# Altium PCB 7688A转接板-V3.2.PcbDoc (part 1 of 2)
Units mm, origin at the board's own origin, x right, y up, seen from the top; angles counter-clockwise.
Board outline 53 x 34 mm, 2 copper layers (Top, Bottom), stack 1.981 mm thick; 6 components, 131 nets, 220 pads, 60 vias.
Unrouted connection lines stored in the file: 5.
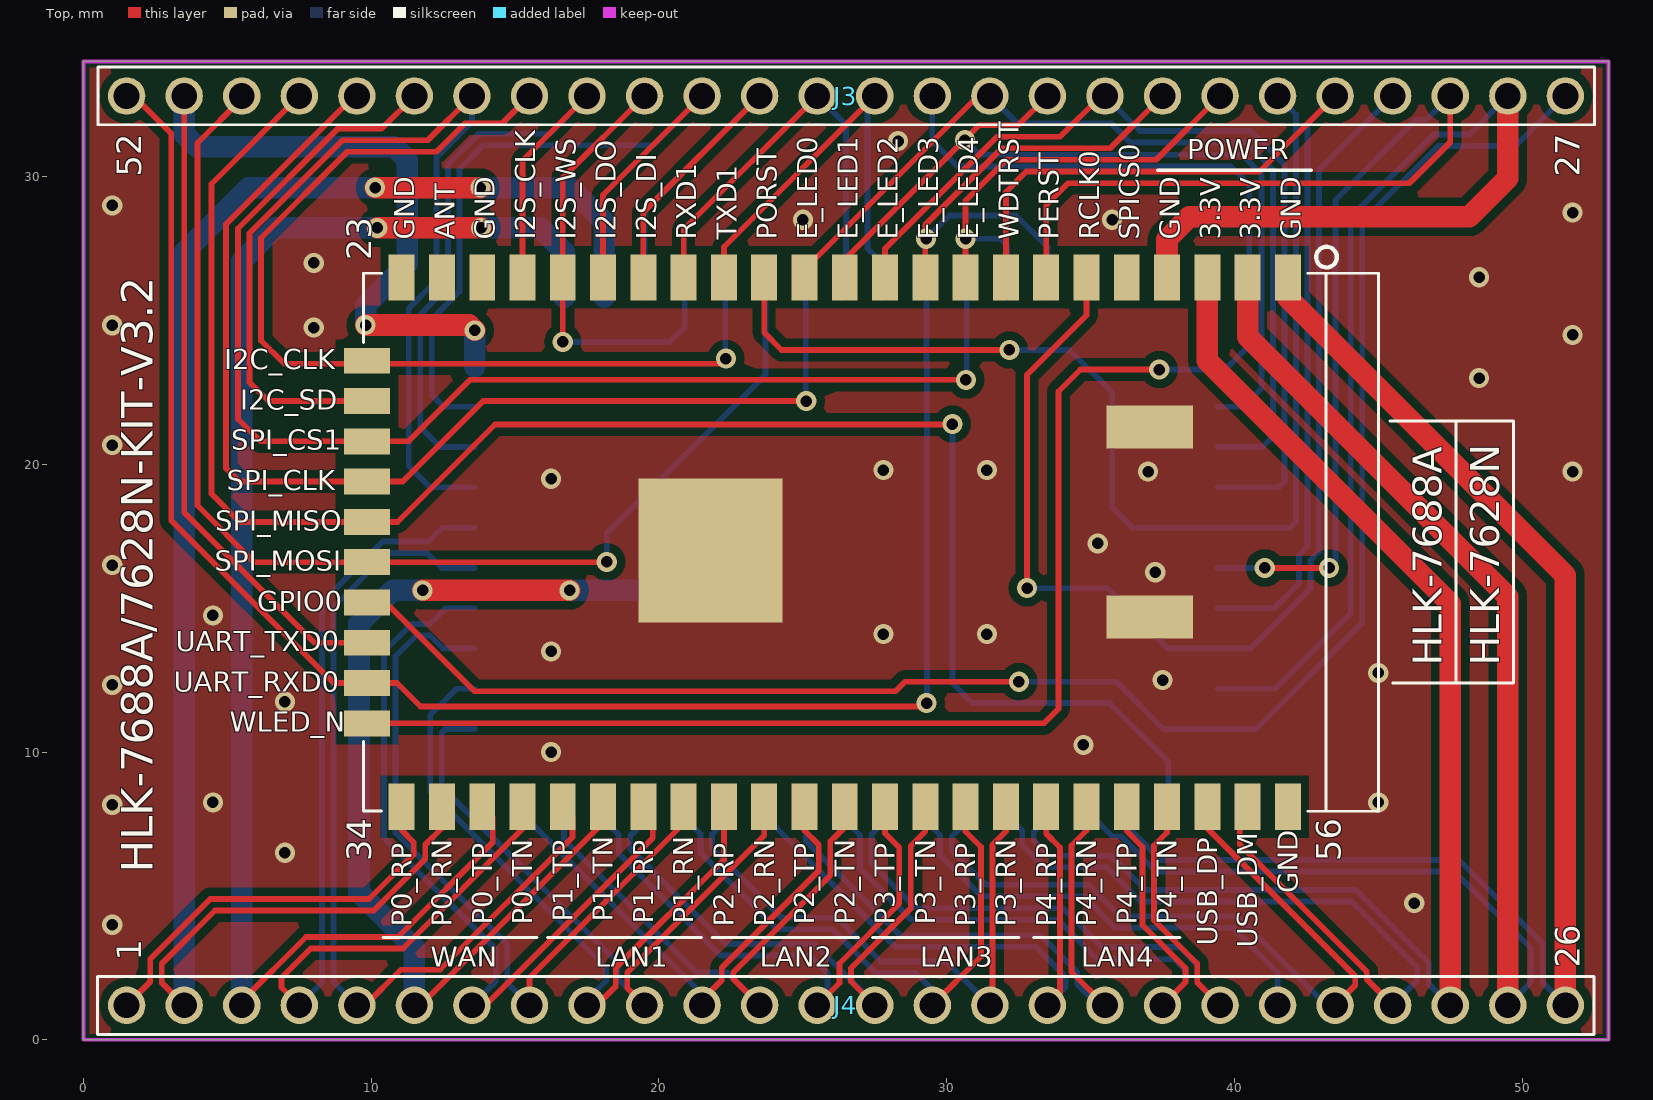
[diagram p0: Top view]
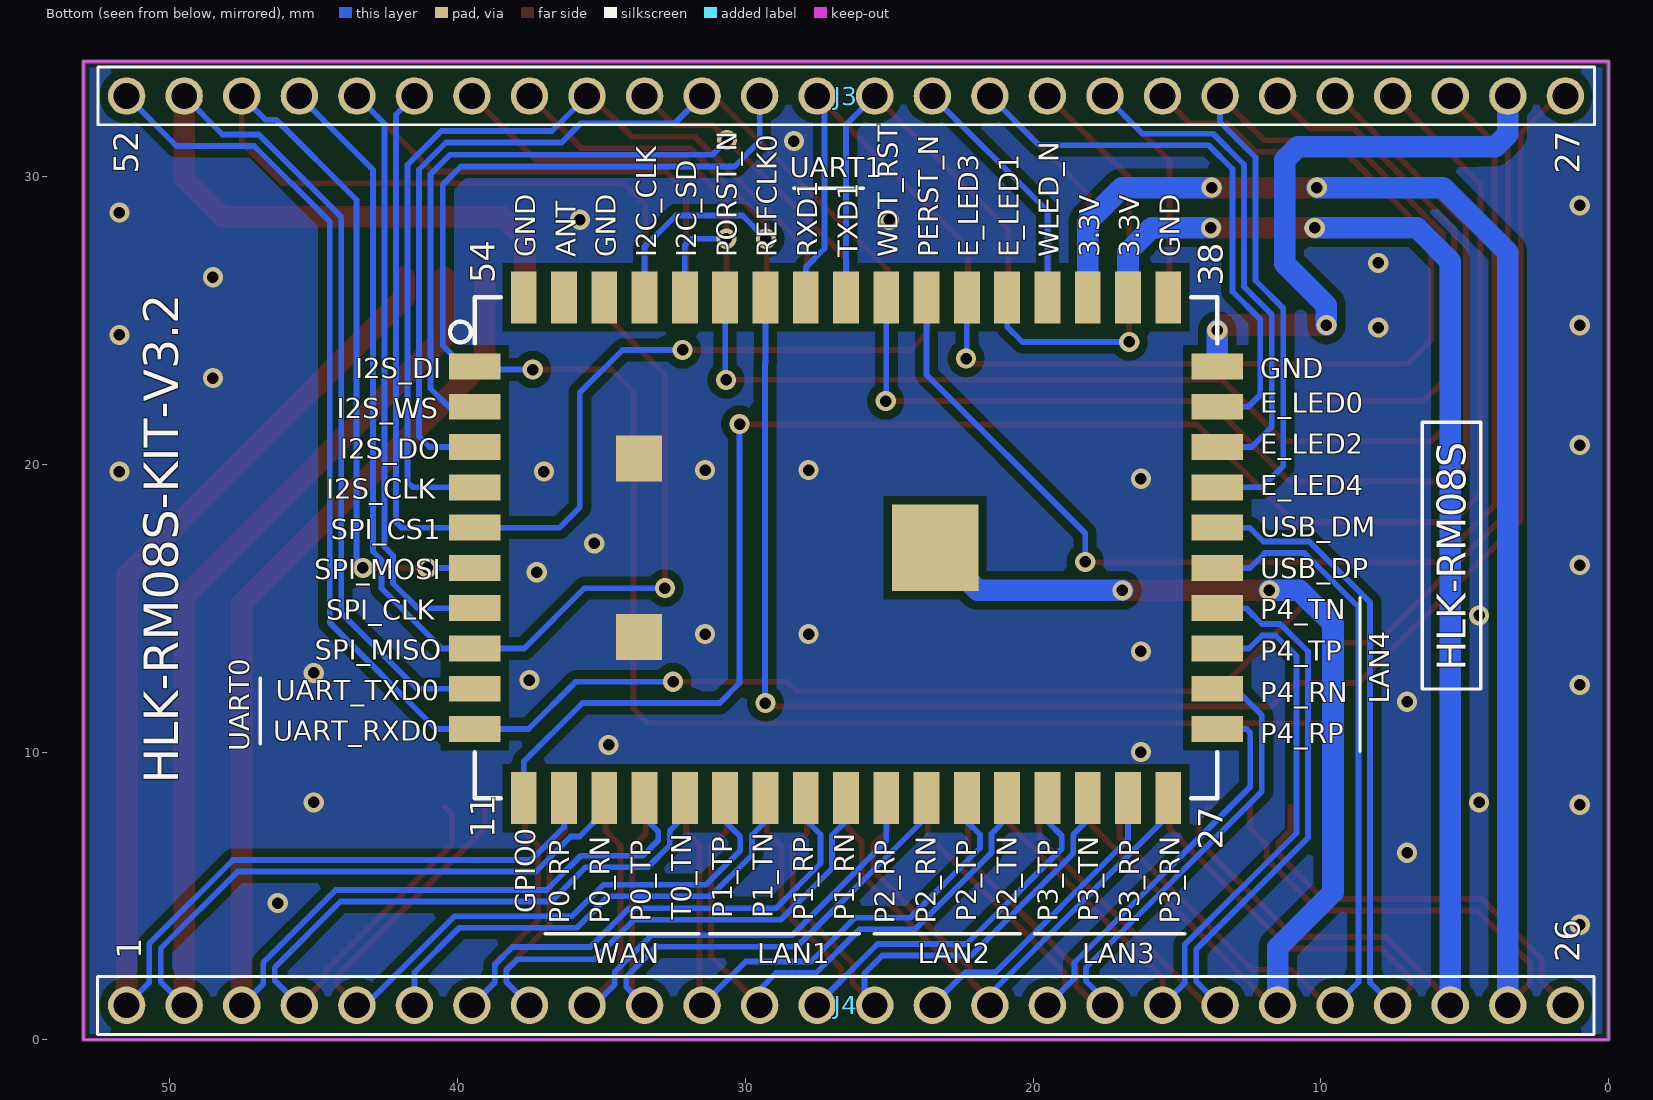
[diagram p1: Bottom view, seen from below]

## Layer stack, top to bottom
Top: signal copper 0.0178
Dielectric: core 1.9456, FR-4, Dk 4.2
Bottom: signal copper 0.0178

## Board outline
0,0 53,0 53,34 0,34

## Design rules (kind name [scope] priority, off if disabled: settings)
Clearance [OnLayer('Keep-Out Layer')] p1: gap=0.15
Clearance "'Net vs. Class' PADS rule_67" [All] p2: gap=0.3
Clearance "'Net vs. Class' PADS rule_66" [InNet('GND') vs InNetClass('50OHM') And (IsTrack Or IsArc Or IsThruPin Or IsSMTPin Or IsVia Or IsFill Or InPolygon)] p3 off: gap=0.203
Clearance "'Net vs. Class' PADS rule_64" [InNet('GND') vs InNetClass('DQ')] p4 off: gap=0.127
Clearance "'Net vs. Class' PADS rule_63" [InNet('GND') And IsSMTPin vs InNetClass('DQ') And IsSMTPin] p5 off: gap=0.178
Clearance "'Net vs. Class' PADS rule_62" [InNet('GND') vs InNetClass('DQ') And (IsTrack Or IsArc Or IsThruPin Or IsSMTPin Or IsVia Or IsFill Or InPolygon)] p6 off: gap=0.127
Clearance "'Net vs. Class' PADS rule_60" [InNet('GND') vs InNetClass('90OHM')] p7 off: gap=0.203
Clearance "'Net vs. Class' PADS rule_59" [InNet('GND') And IsSMTPin vs InNetClass('90OHM') And IsSMTPin] p8 off: gap=0.178
Clearance "'Net vs. Class' PADS rule_58" [InNet('GND') vs InNetClass('90OHM') And (IsTrack Or IsArc Or IsThruPin Or IsSMTPin Or IsVia Or IsFill Or InPolygon)] p9 off: gap=0.203
Clearance "'Net vs. Class' PADS rule_56" [InNet('GND') vs InNetClass('100OHM')] p10 off: gap=0.203
Clearance "'Net vs. Class' PADS rule_54" [InNet('GND') vs InNetClass('100OHM') And (IsTrack Or IsArc Or IsThruPin Or IsSMTPin Or IsVia Or IsFill Or InPolygon)] p11 off: gap=0.203
Clearance "'Net vs. Class' PADS rule_52" [InNet('GND') vs InNetClass('CA')] p12 off: gap=0.127
Clearance "'Net vs. Class' PADS rule_51" [InNet('GND') And IsSMTPin vs InNetClass('CA') And IsSMTPin] p13 off: gap=0.178
Clearance "'Net vs. Class' PADS rule_50" [InNet('GND') vs InNetClass('CA') And (IsTrack Or IsArc Or IsThruPin Or IsSMTPin Or IsVia Or IsFill Or InPolygon)] p14 off: gap=0.127
Clearance "'Classon Layer' PADS rule_48" [InNetClass('DQ') And OnLayer('Top') And IsSMTPin vs IsSMTPin] p15 off: gap=0.178
Clearance "'Classon Layer' PADS rule_47" [InNetClass('DQ') And OnLayer('Top') vs (IsTrack Or IsArc Or IsThruPin Or IsSMTPin Or IsVia Or IsFill Or InPolygon)] p16 off: gap=0.127
Clearance "'Classon Layer' PADS rule_44" [InNetClass('CA') And OnLayer('Top') And IsSMTPin vs IsSMTPin] p17 off: gap=0.178
Clearance "'Classon Layer' PADS rule_42" [InNetClass('CA') And OnLayer('Top') And (IsTrack Or IsArc) vs (IsTrack Or IsArc)] p18 off: gap=0.254
Clearance "'Classon Layer' PADS rule_41" [InNetClass('CA') And OnLayer('Top') vs (IsTrack Or IsArc Or IsThruPin Or IsSMTPin Or IsVia Or IsFill Or InPolygon)] p19 off: gap=0.127
Clearance "'Net' PADS rule_36" [InNetClass('Protel Created NetClass - 1') And (IsTrack Or IsArc) vs (IsTrack Or IsArc)] p20 off: gap=0.102
Clearance "'Class' PADS rule_32" [InNetClass('100OHM') And IsSMTPin vs IsSMTPin] p21 off: gap=0.178
Clearance "'Class' PADS rule_31" [InNetClass('100OHM') vs (IsTrack Or IsArc Or IsThruPin Or IsSMTPin Or IsVia Or IsFill Or InPolygon)] p22 off: gap=0.152
Clearance "'Class' PADS rule_28" [InNetClass('90OHM') vs (IsTrack Or IsArc Or IsThruPin Or IsSMTPin Or IsVia Or IsFill Or InPolygon)] p23 off: gap=0.178
Clearance "'Class' PADS rule_23" [InNetClass('50OHM') And IsSMTPin vs IsSMTPin] p24 off: gap=0.178
Clearance "'Class' PADS rule_22" [InNetClass('50OHM') vs (IsTrack Or IsArc Or IsThruPin Or IsSMTPin Or IsVia Or IsFill Or InPolygon)] p25 off: gap=0.203
Clearance "'Classon Layer' PADS rule_49" [InNetClass('DQ') And OnLayer('Top')] p26 off: gap=0.127
Clearance "'Classon Layer' PADS rule_45" [InNetClass('CA') And OnLayer('Top')] p27 off: gap=0.127
Clearance "'Classon Layer' PADS rule_43" [InNetClass('CA') And OnLayer('Top')] p28 off: gap=0.127
Clearance "'Net' PADS rule_37" [InNetClass('Protel Created NetClass - 1')] p29 off: gap=0.102
Clearance "'Class' PADS rule_33" [InNetClass('100OHM')] p30 off: gap=0.152
Clearance "'Class' PADS rule_24" [InNetClass('50OHM')] p31 off: gap=0.203
Clearance "'Default' PADS rule_19" [All] p32 off: gap=0.102
Clearance "'Default' PADS rule_18" [IsSMTPin vs IsSMTPin] p33 off: gap=0.178
Clearance "'Default' PADS rule_17" [All] p34 off: gap=0.102
Clearance "'Default' PADS rule_16" [(IsTrack Or IsArc) vs (IsTrack Or IsArc)] p35 off: gap=0.127
Clearance "'Default' PADS rule_15" [All] p36 off: gap=0.102
ComponentClearance "'Default' PADS rule_12" [All] p1: gap=0 collisioncheckmode=3 verticalgap=0.254 showdistances=FALSE
FabricationTestpoint [(IsPad And (OnTopLayer Or OnBottomLayer))] p1: side=3 testpointundercomponent=TRUE minsize=1.016 maxsize=2.54 preferedsize=1.524 minholesize=0 maxholesize=1.016 preferedholesize=0.813 testpointgrid=0.025 allowsidetop=TRUE allowsidebottom=TRUE usegrid=TRUE gridtolerance=0
FlightTimeFalling "'Default' PADS rule_6" [All] p1: maximum=10.00
FlightTimeRising "'Default' PADS rule_5" [All] p1: maximum=10.00
Length "'Default' PADS rule" [All] p1: maxlimit=1270 minlimit=0
MatchedLengths "'Default' PADS rule_7" [InNetClass('All Nets')] p1: tolerance=5.08 checknetsindiffpair=TRUE checkdiffpairvsdiffpair=TRUE checkothers=TRUE
MaxMinImpedance "'Default' PADS rule_4" [All] p1: minimum=50.00 maximum=150.0
ParallelSegment "'Default' PADS rule_3" [All] p1: limit=25.4 gap=5.08
ParallelSegment "'Default' PADS rule_2" [All] p2: limit=25.4 gap=5.08
PlaneClearance "'Net vs. Class' PADS rule_65" [InNet('GND') vs InNetClass('50OHM')] p1: clearance=0.203
PlaneClearance "'Net vs. Class' PADS rule_61" [InNet('GND') vs InNetClass('DQ')] p2: clearance=0.152
PlaneClearance "'Net vs. Class' PADS rule_57" [InNet('GND') vs InNetClass('90OHM')] p3: clearance=0.203
PlaneClearance "'Net vs. Class' PADS rule_53" [InNet('GND') vs InNetClass('100OHM')] p4: clearance=0.203
PlaneClearance "'Net vs. Class' PADS rule" [InNet('GND') vs InNetClass('CA')] p5: clearance=0.152
PlaneClearance "'Net' PADS rule_39" [InNetClass('Protel Created NetClass - 2')] p6: clearance=0.152
PlaneClearance "'Net' PADS rule_35" [InNetClass('Protel Created NetClass - 1')] p7: clearance=0.254
PlaneClearance "'Class' PADS rule_29" [InNetClass('100OHM')] p8: clearance=0.152
PlaneClearance "'Class' PADS rule_26" [InNetClass('90OHM')] p9: clearance=0.178
PlaneClearance "'Class' PADS rule_20" [InNetClass('50OHM')] p10: clearance=0.203
PlaneClearance "'Net' PADS rule" [InNetClass('Protel Created NetClass - 3')] p11: clearance=0.152
PlaneClearance "'Default' PADS rule_14" [All] p12: clearance=0.127
PlaneConnect "Power Plane Connect Style - Via from round thru-hole global defaults" [IsVia] p1: planeconnectstyle=Direct reliefexpansion=0.508 reliefentries=4 reliefconductorwidth=0.508 reliefairgap=0.254
PlaneConnect "Power Plane Connect Style - Round thru-hole pad from global defaults" [IsPad And OnMultiLayer And (PadShape_MidLayer1 = 'Round') And (PadXSize_MidLayer1 = PadYSize_MidLayer1)] p2: planeconnectstyle=Direct reliefexpansion=0.508 reliefentries=4 reliefconductorwidth=0.508 reliefairgap=0.254
PlaneConnect "Power Plane Connect Style - Square thru-hole pad from global defaults" [IsPad And OnMultiLayer And ((PadShape_MidLayer1 = 'Rectangular') Or (PadShape_MidLayer1 = 'Octagonal') Or (PadShape_MidLayer1 = 'Rounded Rectangle')) And (PadXSize_MidLayer1 = PadYSize_MidLayer1)] p3: planeconnectstyle=Direct reliefexpansion=0.508 reliefentries=4 reliefconductorwidth=0.508 reliefairgap=0.254
PlaneConnect "Power Plane Connect Style - Rect thru-hole pad from global defaults" [IsPad And OnMultiLayer And ((PadShape_MidLayer1 = 'Rectangular') Or (PadShape_MidLayer1 = 'Octagonal') Or (PadShape_MidLayer1 = 'Rounded Rectangle')) And (PadXSize_MidLayer1 <> PadYSize_MidLayer1)] p4: planeconnectstyle=Direct reliefexpansion=0.508 reliefentries=4 reliefconductorwidth=0.508 reliefairgap=0.254
PlaneConnect "Power Plane Connect Style - Square-rect thru-hole pad from global defaults" [IsPad And OnMultiLayer And (PadShape_MidLayer1 = 'Rounded Rectangle') And (PadXSize_MidLayer1 = PadYSize_MidLayer1) And (Pad_CornerRadius_MidLayer1 = '0%')] p5: planeconnectstyle=Direct reliefexpansion=0.508 reliefentries=4 reliefconductorwidth=0.508 reliefairgap=0.254
PlaneConnect "Power Plane Connect Style - Oval thru-hole pad from global defaults" [IsPad And OnMultiLayer And (PadShape_MidLayer1 = 'Round') And (PadXSize_MidLayer1 <> PadYSize_MidLayer1)] p6: planeconnectstyle=Relief reliefexpansion=0.508 reliefentries=4 reliefconductorwidth=0.508 reliefairgap=0.254
PlaneConnect "Power Plane Connect Style - Round-oval thru-hole pad from global defaults" [IsPad And OnMultiLayer And (PadShape_MidLayer1 = 'Rounded Rectangle') And (PadXSize_MidLayer1 = PadYSize_MidLayer1) And (Pad_CornerRadius_MidLayer1 = '100%')] p7: planeconnectstyle=Relief reliefexpansion=0.508 reliefentries=4 reliefconductorwidth=0.508 reliefairgap=0.254
PolygonConnect "Polygon Connect Style - Bottom Round SMD from global defaults" [IsSMTPin And (PadShape_BottomLayer = 'Round') And (PadXSize_BottomLayer = PADYSize_BottomLayer) vs Layer = 'Bottom'] p1: connectstyle=Direct reliefconductorwidth=0.203 reliefentries=4 polygonreliefangle="45 Angle" airgapwidth=0.254
PolygonConnect "Polygon Connect Style - Top Round SMD from global defaults" [IsSMTPin And (PadShape_TopLayer = 'Round') And (PadXSize_TopLayer = PADYSize_TopLayer) vs Layer = 'Top'] p2: connectstyle=Direct reliefconductorwidth=0.203 reliefentries=4 polygonreliefangle="45 Angle" airgapwidth=0.254
PolygonConnect "Polygon Connect Style - Bottom Square SMD from global defaults 1" [IsSMTPin And (PadShape_BottomLayer = 'Rectangular') And (PadXSize_BottomLayer = PADYSize_BottomLayer) vs Layer = 'Bottom'] p3: connectstyle=Direct reliefconductorwidth=0.203 reliefentries=4 polygonreliefangle="45 Angle" airgapwidth=0.254
PolygonConnect "Polygon Connect Style - Bottom Square SMD from global defaults 2" [IsSMTPin And (PadShape_BottomLayer = 'Octagonal') And (PadXSize_BottomLayer = PADYSize_BottomLayer) vs Layer = 'Bottom'] p4: connectstyle=Direct reliefconductorwidth=0.203 reliefentries=4 polygonreliefangle="45 Angle" airgapwidth=0.254
PolygonConnect "Polygon Connect Style - Bottom Square SMD from global defaults 3" [IsSMTPin And (PadShape_BottomLayer = 'Rounded Rectangle') And (PadXSize_BottomLayer = PADYSize_BottomLayer) vs Layer = 'Bottom'] p5: connectstyle=Direct reliefconductorwidth=0.203 reliefentries=4 polygonreliefangle="45 Angle" airgapwidth=0.254
PolygonConnect "Polygon Connect Style - Top Square SMD from global defaults 1" [IsSMTPin And (PadShape_TopLayer = 'Rectangular') And (PadXSize_TopLayer = PADYSize_TopLayer) vs Layer = 'Top'] p6: connectstyle=Direct reliefconductorwidth=0.203 reliefentries=4 polygonreliefangle="45 Angle" airgapwidth=0.254
PolygonConnect "Polygon Connect Style - Top Square SMD from global defaults 2" [IsSMTPin And (PadShape_TopLayer = 'Octagonal') And (PadXSize_TopLayer = PADYSize_TopLayer) vs Layer = 'Top'] p7: connectstyle=Direct reliefconductorwidth=0.203 reliefentries=4 polygonreliefangle="45 Angle" airgapwidth=0.254
PolygonConnect "Polygon Connect Style - Top Square SMD from global defaults 3" [IsSMTPin And (PadShape_TopLayer = 'Rounded Rectangle') And (PadXSize_TopLayer = PADYSize_TopLayer) vs Layer = 'Top'] p8: connectstyle=Direct reliefconductorwidth=0.203 reliefentries=4 polygonreliefangle="45 Angle" airgapwidth=0.254
PolygonConnect "Polygon Connect Style - Bottom Rect SMD from global defaults 1" [IsSMTPin And (PadShape_BottomLayer = 'Rectangular') And (PadXSize_BottomLayer <> PADYSize_BottomLayer) vs Layer = 'Bottom'] p9: connectstyle=Direct reliefconductorwidth=0.203 reliefentries=4 polygonreliefangle="45 Angle" airgapwidth=0.254
PolygonConnect "Polygon Connect Style - Bottom Rect SMD from global defaults 2" [IsSMTPin And (PadShape_BottomLayer = 'Octagonal') And (PadXSize_BottomLayer <> PADYSize_BottomLayer) vs Layer = 'Bottom'] p10: connectstyle=Direct reliefconductorwidth=0.203 reliefentries=4 polygonreliefangle="45 Angle" airgapwidth=0.254
PolygonConnect "Polygon Connect Style - Bottom Rect SMD from global defaults 3" [IsSMTPin And (PadShape_BottomLayer = 'Rounded Rectangle') And (PadXSize_BottomLayer <> PADYSize_BottomLayer) vs Layer = 'Bottom'] p11: connectstyle=Direct reliefconductorwidth=0.203 reliefentries=4 polygonreliefangle="45 Angle" airgapwidth=0.254
PolygonConnect "Polygon Connect Style - Bottom Square-rect SMD pad from global defaults" [IsSMTPin And (PadShape_BottomLayer = 'Rounded Rectangle') And (PadXSize_BottomLayer = PADYSize_BottomLayer) And (Pad_CornerRadius_BottomLayer = '0%') vs Layer = 'Bottom'] p12: connectstyle=Direct reliefconductorwidth=0.203 reliefentries=4 polygonreliefangle="45 Angle" airgapwidth=0.254
PolygonConnect "Polygon Connect Style - Top Rect SMD from global defaults 1" [IsSMTPin And (PadShape_TopLayer = 'Rectangular') And (PadXSize_TopLayer <> PADYSize_TopLayer) vs Layer = 'Top'] p13: connectstyle=Direct reliefconductorwidth=0.203 reliefentries=4 polygonreliefangle="45 Angle" airgapwidth=0.254
PolygonConnect "Polygon Connect Style - Top Rect SMD from global defaults 2" [IsSMTPin And (PadShape_TopLayer = 'Octagonal') And (PadXSize_TopLayer <> PADYSize_TopLayer) vs Layer = 'Top'] p14: connectstyle=Direct reliefconductorwidth=0.203 reliefentries=4 polygonreliefangle="45 Angle" airgapwidth=0.254
PolygonConnect "Polygon Connect Style - Top Rect SMD from global defaults 3" [IsSMTPin And (PadShape_TopLayer = 'Rounded Rectangle') And (PadXSize_TopLayer <> PADYSize_TopLayer) vs Layer = 'Top'] p15: connectstyle=Direct reliefconductorwidth=0.203 reliefentries=4 polygonreliefangle="45 Angle" airgapwidth=0.254
PolygonConnect "Polygon Connect Style - Top Square-rect SMD pad from global defaults" [IsSMTPin And (PadShape_TopLayer = 'Rounded Rectangle') And (PadXSize_TopLayer = PADYSize_TopLayer) And (Pad_CornerRadius_TopLayer = '0%') vs Layer = 'Top'] p16: connectstyle=Direct reliefconductorwidth=0.203 reliefentries=4 polygonreliefangle="45 Angle" airgapwidth=0.254
PolygonConnect "Polygon Connect Style - Bottom Oval SMD from global defaults" [IsSMTPin And (PadShape_BottomLayer = 'Round') And (PadXSize_BottomLayer <> PADYSize_BottomLayer) vs Layer = 'Bottom'] p17: connectstyle=Direct reliefconductorwidth=0.203 reliefentries=4 polygonreliefangle="45 Angle" airgapwidth=0.254
PolygonConnect "Polygon Connect Style - Bottom Round-oval SMD pad from global defaults" [IsSMTPin And (PadShape_BottomLayer = 'Rounded Rectangle') And (PadXSize_BottomLayer = PADYSize_BottomLayer) And (Pad_CornerRadius_BottomLayer = '100%') vs Layer = 'Bottom'] p18: connectstyle=Direct reliefconductorwidth=0.203 reliefentries=4 polygonreliefangle="45 Angle" airgapwidth=0.254
PolygonConnect "Polygon Connect Style - Top Oval SMD from global defaults" [IsSMTPin And (PadShape_TopLayer = 'Round') And (PadXSize_TopLayer <> PADYSize_TopLayer) vs Layer = 'Top'] p19: connectstyle=Direct reliefconductorwidth=0.203 reliefentries=4 polygonreliefangle="45 Angle" airgapwidth=0.254
PolygonConnect "Polygon Connect Style - Top Round-oval SMD pad from global defaults" [IsSMTPin And (PadShape_TopLayer = 'Rounded Rectangle') And (PadXSize_TopLayer = PADYSize_TopLayer) And (Pad_CornerRadius_TopLayer = '100%') vs Layer = 'Top'] p20: connectstyle=Direct reliefconductorwidth=0.203 reliefentries=4 polygonreliefangle="45 Angle" airgapwidth=0.254
PolygonConnect "Polygon Connect Style - Via from round thru-hole global defaults_71" [IsVia] p21: connectstyle=Direct reliefconductorwidth=0.508 reliefentries=4 polygonreliefangle="45 Angle" airgapwidth=0.254
PolygonConnect "Polygon Connect Style - Bottom Round thru-hole pad from global defaults" [IsPad And OnMultiLayer And (PadShape_BottomLayer = 'Round') And (PadXSize_BottomLayer = PADYSize_BottomLayer) vs Layer = 'Bottom'] p22: connectstyle=Direct reliefconductorwidth=0.508 reliefentries=4 polygonreliefangle="45 Angle" airgapwidth=0.254
PolygonConnect "Polygon Connect Style - Via from round thru-hole global defaults_70" [IsVia] p23: connectstyle=Direct reliefconductorwidth=0.508 reliefentries=4 polygonreliefangle="45 Angle" airgapwidth=0.254
PolygonConnect "Polygon Connect Style - Inner Layer 3 Round thru-hole pad from global defaults" [IsPad And OnMultiLayer And (PadShape_MidLayer2 = 'Round') And (PadXSize_MidLayer2 = PADYSize_MidLayer2) vs Layer = 'Inner Layer 3'] p24: connectstyle=Direct reliefconductorwidth=0.508 reliefentries=4 polygonreliefangle="45 Angle" airgapwidth=0.254
PolygonConnect "Polygon Connect Style - Via from round thru-hole global defaults_69" [IsVia] p25: connectstyle=Direct reliefconductorwidth=0.508 reliefentries=4 polygonreliefangle="45 Angle" airgapwidth=0.254
PolygonConnect "Polygon Connect Style - Inner Layer 2 Round thru-hole pad from global defaults" [IsPad And OnMultiLayer And (PadShape_MidLayer1 = 'Round') And (PadXSize_MidLayer1 = PADYSize_MidLayer1) vs Layer = 'Inner Layer 2'] p26: connectstyle=Direct reliefconductorwidth=0.508 reliefentries=4 polygonreliefangle="45 Angle" airgapwidth=0.254
PolygonConnect "Polygon Connect Style - Via from round thru-hole global defaults" [IsVia] p27: connectstyle=Direct reliefconductorwidth=0.508 reliefentries=4 polygonreliefangle="45 Angle" airgapwidth=0.254
PolygonConnect "Polygon Connect Style - Top Round thru-hole pad from global defaults" [IsPad And OnMultiLayer And (PadShape_TopLayer = 'Round') And (PadXSize_TopLayer = PADYSize_TopLayer) vs Layer = 'Top'] p28: connectstyle=Direct reliefconductorwidth=0.508 reliefentries=4 polygonreliefangle="45 Angle" airgapwidth=0.254
PolygonConnect "Polygon Connect Style - Bottom Square thru-hole pad from global defaults" [IsPad And OnMultiLayer And ((PadShape_BottomLayer = 'Rectangular') Or (PadShape_BottomLayer = 'Octagonal') Or (PadShape_BottomLayer = 'Rounded Rectangle')) And (PadXSize_BottomLayer = PADYSize_BottomLayer) vs Layer = 'Bottom'] p29: connectstyle=Direct reliefconductorwidth=0.508 reliefentries=4 polygonreliefangle="45 Angle" airgapwidth=0.254
PolygonConnect "Polygon Connect Style - Inner Layer 3 Square thru-hole pad from global defaults" [IsPad And OnMultiLayer And ((PadShape_MidLayer2 = 'Rectangular') Or (PadShape_MidLayer2 = 'Octagonal') Or (PadShape_MidLayer2 = 'Rounded Rectangle')) And (PadXSize_MidLayer2 = PADYSize_MidLayer2) vs Layer = 'Inner Layer 3'] p30: connectstyle=Direct reliefconductorwidth=0.508 reliefentries=4 polygonreliefangle="45 Angle" airgapwidth=0.254
PolygonConnect "Polygon Connect Style - Inner Layer 2 Square thru-hole pad from global defaults" [IsPad And OnMultiLayer And ((PadShape_MidLayer1 = 'Rectangular') Or (PadShape_MidLayer1 = 'Octagonal') Or (PadShape_MidLayer1 = 'Rounded Rectangle')) And (PadXSize_MidLayer1 = PADYSize_MidLayer1) vs Layer = 'Inner Layer 2'] p31: connectstyle=Direct reliefconductorwidth=0.508 reliefentries=4 polygonreliefangle="45 Angle" airgapwidth=0.254
PolygonConnect "Polygon Connect Style - Top Square thru-hole pad from global defaults" [IsPad And OnMultiLayer And ((PadShape_TopLayer = 'Rectangular') Or (PadShape_TopLayer = 'Octagonal') Or (PadShape_TopLayer = 'Rounded Rectangle')) And (PadXSize_TopLayer = PADYSize_TopLayer) vs Layer = 'Top'] p32: connectstyle=Direct reliefconductorwidth=0.508 reliefentries=4 polygonreliefangle="45 Angle" airgapwidth=0.254
PolygonConnect "Polygon Connect Style - Bottom Rect thru-hole pad from global defaults" [IsPad And OnMultiLayer And ((PadShape_BottomLayer = 'Rectangular') Or (PadShape_BottomLayer = 'Octagonal') Or (PadShape_BottomLayer = 'Rounded Rectangle')) And (PadXSize_BottomLayer <> PADYSize_BottomLayer) vs Layer = 'Bottom'] p33: connectstyle=Direct reliefconductorwidth=0.508 reliefentries=4 polygonreliefangle="45 Angle" airgapwidth=0.254
PolygonConnect "Polygon Connect Style - Bottom Square-rect thru-hole pad from global defaults" [IsPad And OnMultiLayer And (PadShape_BottomLayer = 'Rounded Rectangle') And (PadXSize_BottomLayer = PADYSize_BottomLayer) And (Pad_CornerRadius_BottomLayer = '0%') vs Layer = 'Bottom'] p34: connectstyle=Direct reliefconductorwidth=0.508 reliefentries=4 polygonreliefangle="45 Angle" airgapwidth=0.254
PolygonConnect "Polygon Connect Style - Inner Layer 3 Rect thru-hole pad from global defaults" [IsPad And OnMultiLayer And ((PadShape_MidLayer2 = 'Rectangular') Or (PadShape_MidLayer2 = 'Octagonal') Or (PadShape_MidLayer2 = 'Rounded Rectangle')) And (PadXSize_MidLayer2 <> PADYSize_MidLayer2) vs Layer = 'Inner Layer 3'] p35: connectstyle=Direct reliefconductorwidth=0.508 reliefentries=4 polygonreliefangle="45 Angle" airgapwidth=0.254
PolygonConnect "Polygon Connect Style - Inner Layer 3 Square-rect thru-hole pad from global defaults" [IsPad And OnMultiLayer And (PadShape_MidLayer2 = 'Rounded Rectangle') And (PadXSize_MidLayer2 = PADYSize_MidLayer2) And (Pad_CornerRadius_MidLayer2 = '0%') vs Layer = 'Inner Layer 3'] p36: connectstyle=Direct reliefconductorwidth=0.508 reliefentries=4 polygonreliefangle="45 Angle" airgapwidth=0.254
PolygonConnect "Polygon Connect Style - Inner Layer 2 Rect thru-hole pad from global defaults" [IsPad And OnMultiLayer And ((PadShape_MidLayer1 = 'Rectangular') Or (PadShape_MidLayer1 = 'Octagonal') Or (PadShape_MidLayer1 = 'Rounded Rectangle')) And (PadXSize_MidLayer1 <> PADYSize_MidLayer1) vs Layer = 'Inner Layer 2'] p37: connectstyle=Direct reliefconductorwidth=0.508 reliefentries=4 polygonreliefangle="45 Angle" airgapwidth=0.254
PolygonConnect "Polygon Connect Style - Inner Layer 2 Square-rect thru-hole pad from global defaults" [IsPad And OnMultiLayer And (PadShape_MidLayer1 = 'Rounded Rectangle') And (PadXSize_MidLayer1 = PADYSize_MidLayer1) And (Pad_CornerRadius_MidLayer1 = '0%') vs Layer = 'Inner Layer 2'] p38: connectstyle=Direct reliefconductorwidth=0.508 reliefentries=4 polygonreliefangle="45 Angle" airgapwidth=0.254
PolygonConnect "Polygon Connect Style - Top Rect thru-hole pad from global defaults" [IsPad And OnMultiLayer And ((PadShape_TopLayer = 'Rectangular') Or (PadShape_TopLayer = 'Octagonal') Or (PadShape_TopLayer = 'Rounded Rectangle')) And (PadXSize_TopLayer <> PADYSize_TopLayer) vs Layer = 'Top'] p39: connectstyle=Direct reliefconductorwidth=0.508 reliefentries=4 polygonreliefangle="45 Angle" airgapwidth=0.254
PolygonConnect "Polygon Connect Style - Top Square-rect thru-hole pad from global defaults" [IsPad And OnMultiLayer And (PadShape_TopLayer = 'Rounded Rectangle') And (PadXSize_TopLayer = PADYSize_TopLayer) And (Pad_CornerRadius_TopLayer = '0%') vs Layer = 'Top'] p40: connectstyle=Direct reliefconductorwidth=0.508 reliefentries=4 polygonreliefangle="45 Angle" airgapwidth=0.254
PolygonConnect "Polygon Connect Style - Bottom Oval thru-hole pad from global defaults" [IsPad And OnMultiLayer And (PadShape_BottomLayer = 'Round') And (PadXSize_BottomLayer <> PADYSize_BottomLayer) vs Layer = 'Bottom'] p41: connectstyle=Relief reliefconductorwidth=0.508 reliefentries=4 polygonreliefangle="45 Angle" airgapwidth=0.254
PolygonConnect "Polygon Connect Style - Bottom Round-oval thru-hole pad from global defaults" [IsPad And OnMultiLayer And (PadShape_BottomLayer = 'Rounded Rectangle') And (PadXSize_BottomLayer = PADYSize_BottomLayer) And (Pad_CornerRadius_BottomLayer = '100%') vs Layer = 'Bottom'] p42: connectstyle=Relief reliefconductorwidth=0.508 reliefentries=4 polygonreliefangle="45 Angle" airgapwidth=0.254
PolygonConnect "Polygon Connect Style - Inner Layer 3 Oval thru-hole pad from global defaults" [IsPad And OnMultiLayer And (PadShape_MidLayer2 = 'Round') And (PadXSize_MidLayer2 <> PADYSize_MidLayer2) vs Layer = 'Inner Layer 3'] p43: connectstyle=Relief reliefconductorwidth=0.508 reliefentries=4 polygonreliefangle="45 Angle" airgapwidth=0.254
PolygonConnect "Polygon Connect Style - Inner Layer 3 Round-oval thru-hole pad from global defaults" [IsPad And OnMultiLayer And (PadShape_MidLayer2 = 'Rounded Rectangle') And (PadXSize_MidLayer2 = PADYSize_MidLayer2) And (Pad_CornerRadius_MidLayer2 = '100%') vs Layer = 'Inner Layer 3'] p44: connectstyle=Relief reliefconductorwidth=0.508 reliefentries=4 polygonreliefangle="45 Angle" airgapwidth=0.254
PolygonConnect "Polygon Connect Style - Inner Layer 2 Oval thru-hole pad from global defaults" [IsPad And OnMultiLayer And (PadShape_MidLayer1 = 'Round') And (PadXSize_MidLayer1 <> PADYSize_MidLayer1) vs Layer = 'Inner Layer 2'] p45: connectstyle=Relief reliefconductorwidth=0.508 reliefentries=4 polygonreliefangle="45 Angle" airgapwidth=0.254
PolygonConnect "Polygon Connect Style - Inner Layer 2 Round-oval thru-hole pad from global defaults" [IsPad And OnMultiLayer And (PadShape_MidLayer1 = 'Rounded Rectangle') And (PadXSize_MidLayer1 = PADYSize_MidLayer1) And (Pad_CornerRadius_MidLayer1 = '100%') vs Layer = 'Inner Layer 2'] p46: connectstyle=Relief reliefconductorwidth=0.508 reliefentries=4 polygonreliefangle="45 Angle" airgapwidth=0.254
PolygonConnect "Polygon Connect Style - Top Oval thru-hole pad from global defaults" [IsPad And OnMultiLayer And (PadShape_TopLayer = 'Round') And (PadXSize_TopLayer <> PADYSize_TopLayer) vs Layer = 'Top'] p47: connectstyle=Relief reliefconductorwidth=0.508 reliefentries=4 polygonreliefangle="45 Angle" airgapwidth=0.254
PolygonConnect "Polygon Connect Style - Top Round-oval thru-hole pad from global defaults" [IsPad And OnMultiLayer And (PadShape_TopLayer = 'Rounded Rectangle') And (PadXSize_TopLayer = PADYSize_TopLayer) And (Pad_CornerRadius_TopLayer = '100%') vs Layer = 'Top'] p48: connectstyle=Relief reliefconductorwidth=0.508 reliefentries=4 polygonreliefangle="45 Angle" airgapwidth=0.254
PolygonConnect [All] p49: connectstyle=Relief reliefconductorwidth=0.254 reliefentries=4 polygonreliefangle="90 Angle" airgapwidth=0.254
RoutingLayers "'Default' PADS rule_10" [All] p1: top layer_v5=TRUE bottom layer_v5=TRUE
RoutingPriority "'Default' PADS rule_9" [All] p1: routingpriority=3
RoutingTopology "'Default' PADS rule_8" [All] p1: topology=Shortest
RoutingVias "'Default' PADS rule_11" [All] p1: holewidth=0.4 width=0.7 viastyle="Through Hole" minholewidth=0.305 minwidth=0.7 maxholewidth=1 maxwidth=1
SMDToPlane "'Classon Layer' PADS rule_46" [InNetClass('DQ') And OnLayer('Top')] p1: distance=20000
SMDToPlane "'Classon Layer' PADS rule_40" [InNetClass('CA') And OnLayer('Top')] p2: distance=20000
SMDToPlane "'Class' PADS rule_30" [InNetClass('100OHM')] p3: distance=20000
SMDToPlane "'Class' PADS rule_27" [InNetClass('90OHM')] p4: distance=20000
SMDToPlane "'Class' PADS rule_21" [InNetClass('50OHM')] p5: distance=20000
SolderMaskExpansion "Solder Mask Expansion from CAM settings" [All] p1: expansion=0.051
Width "'Classon Layer' PADS rule" [InNetClass('CA') And OnLayer('Top')] p1 off: maxlimit=5.08 minlimit=0.127 preferedwidth=0.127
Width "'Net' PADS rule_38" [InNetClass('Protel Created NetClass - 2')] p2 off: maxlimit=5.08 minlimit=0.076 preferedwidth=0.165
Width "'Net' PADS rule_34" [InNetClass('Protel Created NetClass - 1')] p3 off: maxlimit=5.08 minlimit=0.076 preferedwidth=0.305
Width "'Class' PADS rule_25" [InNetClass('90OHM')] p4 off: maxlimit=5.08 minlimit=0.076 preferedwidth=0.178
Width "'Class' PADS rule" [InNetClass('50OHM')] p5 off: maxlimit=5.08 minlimit=0.076 preferedwidth=0.178
Width "'Default' PADS rule_13" [All] p6: maxlimit=2 minlimit=0.2 preferedwidth=0.2
21 further rules are at their usual default settings.

## Classes and differential pairs
net class CA: DDR_BA0 DDR_BA1 DDR_BA2 DDR_CASN DDR_CSN DDR_MCKE DDR_MODT DDR_RASN DDR_WEN MADDR0 MADDR1 MADDR2 MADDR3 MADDR4 MADDR5 MADDR6 MADDR7 MADDR8 MADDR9 MADDR10 MADDR11 MADDR12 MADDR13
net class CLASS_0: N17083158 N17083162 N17083174 N17083274 N17083406 N17083412 N17415955 N17415957 N17416113 N17416117 N17416125 N17416142 N17416414 RFOUT_G0_L WF0_IPA WF1_IPA
net class CLASS_1: RXIN0 RXIP0
net class CLASS_2: N18021801 N18021821 USB_DN USB_DP
net class DQ: DDR_MDQM0 DDR_MDQM1 DDR_MDQS0 DDR_MDQS1 MDATA0 MDATA1 MDATA2 MDATA3 MDATA4 MDATA5 MDATA6 MDATA7 MDATA8 MDATA9 MDATA10 MDATA11 MDATA12 MDATA13 MDATA14 MDATA15
net class "Protel Created NetClass - 1": N17083158 N17083162 N17083174 N17083274 N17083406 N17083412 N17415955 N17415957 N17416113 N17416117 N17416125 N17416142 N17416414 RFOUT_G0_L WF0_IPA WF1_IPA
net class "Protel Created NetClass - 2": N18021801 N18021821 USB_DN USB_DP
net class "Protel Created NetClass - 3": RXIN0 RXIP0

## Components (designator, comment, footprint, x,y, rotation, side; value= is the part's Value field where it differs from the comment)
HLK-7688A "Comment" 7688A 41.857,26.499 r0 top locked
HLK-RM08S "Comment" RM08S 39.4,8.4 r180 bottom locked
J3 "DIP-2.0-26P" DIP-2.0-26P 51.5,32.8 r180 bottom
J3 "DIP-2.0-26P" DIP-2.0-26P 1.5,32.8 r0 top
J4 "DIP-2.0-26P" DIP-2.0-26P 51.5,1.2 r180 bottom
J4 "DIP-2.0-26P" DIP-2.0-26P 1.5,1.2 r0 top

## Footprints (in the part's own frame and the unit in brackets; to place one, negate y for a bottom-side part, rotate by r counter-clockwise, add the part's x,y. Pads: shape width x height; smd on the part's side, far side on the other; paste and mask are expansions set on the pad)
7688A [mm]
  rect 0.9x1.6 smd: 1(0,0) 2(-1.4,0) 3(-2.8,0) 4(-4.2,0) 5(-5.6,0) 6(-7,0) 7(-8.4,0) 8(-9.8,0) 9(-11.2,0) 10(-12.6,0) 11(-14,0) 12(-15.4,0) 13(-16.8,0) 14(-18.2,0) 15(-19.6,0) 16(-21,0) 17(-22.4,0) 18(-23.8,0) 19(-25.2,0) 20(-26.6,0) 21(-28,0) 22(-29.4,0) 23(-30.8,0) 34(-30.8,-18.4) 35(-29.4,-18.4) 36(-28,-18.4) 37(-26.6,-18.4) 38(-25.2,-18.4) 39(-23.8,-18.4) 40(-22.4,-18.4) 41(-21,-18.4) 42(-19.6,-18.4) 43(-18.2,-18.4) 44(-16.8,-18.4) 45(-15.4,-18.4) 46(-14,-18.4) 47(-12.6,-18.4) 48(-11.2,-18.4) 49(-9.8,-18.4) 50(-8.4,-18.4) 51(-7,-18.4) 52(-5.6,-18.4) 53(-4.2,-18.4) 54(-2.8,-18.4) 55(-1.4,-18.4) 56(0,-18.4)
  rect 1.6x0.9 smd: 24(-32,-2.9) 25(-32,-4.3) 26(-32,-5.7) 27(-32,-7.1) 28(-32,-8.5) 29(-32,-9.9) 30(-32,-11.3) 31(-32,-12.7) 32(-32,-14.1) 33(-32,-15.5)
  rect 3x1.5 smd: 57(-4.8,-11.8) 58(-4.8,-5.2)
  rect 5x5 smd: 59(-20.066,-9.5)
  silkscreen extent -32.13,-18.56 1.7,1.06
DIP-2.0-26P [mm]
  round 1.3 / inner round 1.2 / far side round 1.2 hole 0.9: 1(0,0) 2(2,0) 3(4,0) 4(6,0) 5(8,0) 6(10,0) 7(12,0) 8(14,0) 9(16,0) 10(18,0) 11(20,0) 12(22,0) 13(24,0) 14(26,0) 15(28,0) 16(30,0) 17(32,0) 18(34,0) 19(36,0) 20(38,0) 21(40,0) 22(42,0) 23(44,0) 24(46,0) 25(48,0) 26(50,0)
RM08S [mm]
  rect 1.8x0.9 smd: 1(0,15) 2(0,13.6) 3(0,12.2) 4(0,10.8) 5(0,9.4) 6(0,8) 7(0,6.6) 8(0,5.2) 9(0,3.8) 10(0,2.4) 28(25.8,2.4) 29(25.8,3.8) 30(25.8,5.2) 31(25.8,6.6) 32(25.8,8) 33(25.8,9.4) 34(25.8,10.8) 35(25.8,12.2) 36(25.8,13.6) 37(25.8,15)
  rect 0.9x1.8 smd: 11(1.7,0) 12(3.1,0) 13(4.5,0) 14(5.9,0) 15(7.3,0) 16(8.7,0) 17(10.1,0) 18(11.5,0) 19(12.9,0) 20(14.3,0) 21(15.7,0) 22(17.1,0) 23(18.5,0) 24(19.9,0) 25(21.3,0) 26(22.7,0) 27(24.1,0) 38(24.1,17.4) 39(22.7,17.4) 40(21.3,17.4) 41(19.9,17.4) 42(18.5,17.4) 43(17.1,17.4) 44(15.7,17.4) 45(14.3,17.4) 46(12.9,17.4) 47(11.5,17.4) 48(10.1,17.4) 49(8.7,17.4) 50(7.3,17.4) 51(5.9,17.4) 52(4.5,17.4) 53(3.1,17.4) 54(1.7,17.4)
  rect 1.6x1.6 smd: 55(5.7,11.8) 56(5.7,5.6)
  rect 3x3 smd: 57(16,8.7)
  silkscreen extent -0.86,0 25.8,17.4

## Via types
v1: diameter 0.7, hole 0.4, Top to Bottom, tented both sides, 59 vias
v2: diameter 0.7, hole 0.4, Top to Bottom, 1 vias